# Altium PCB PCB1_DEC17.pcbdoc (part 2 of 2)
Units mil, origin at the board's own origin, x right, y up, seen from the top; angles counter-clockwise.
Board outline 2970 x 3145 mil, 2 copper layers (Top Layer, Bottom Layer); 82 components, 60 nets, 291 pads, 26 vias.
Unrouted connection lines stored in the file: 64.
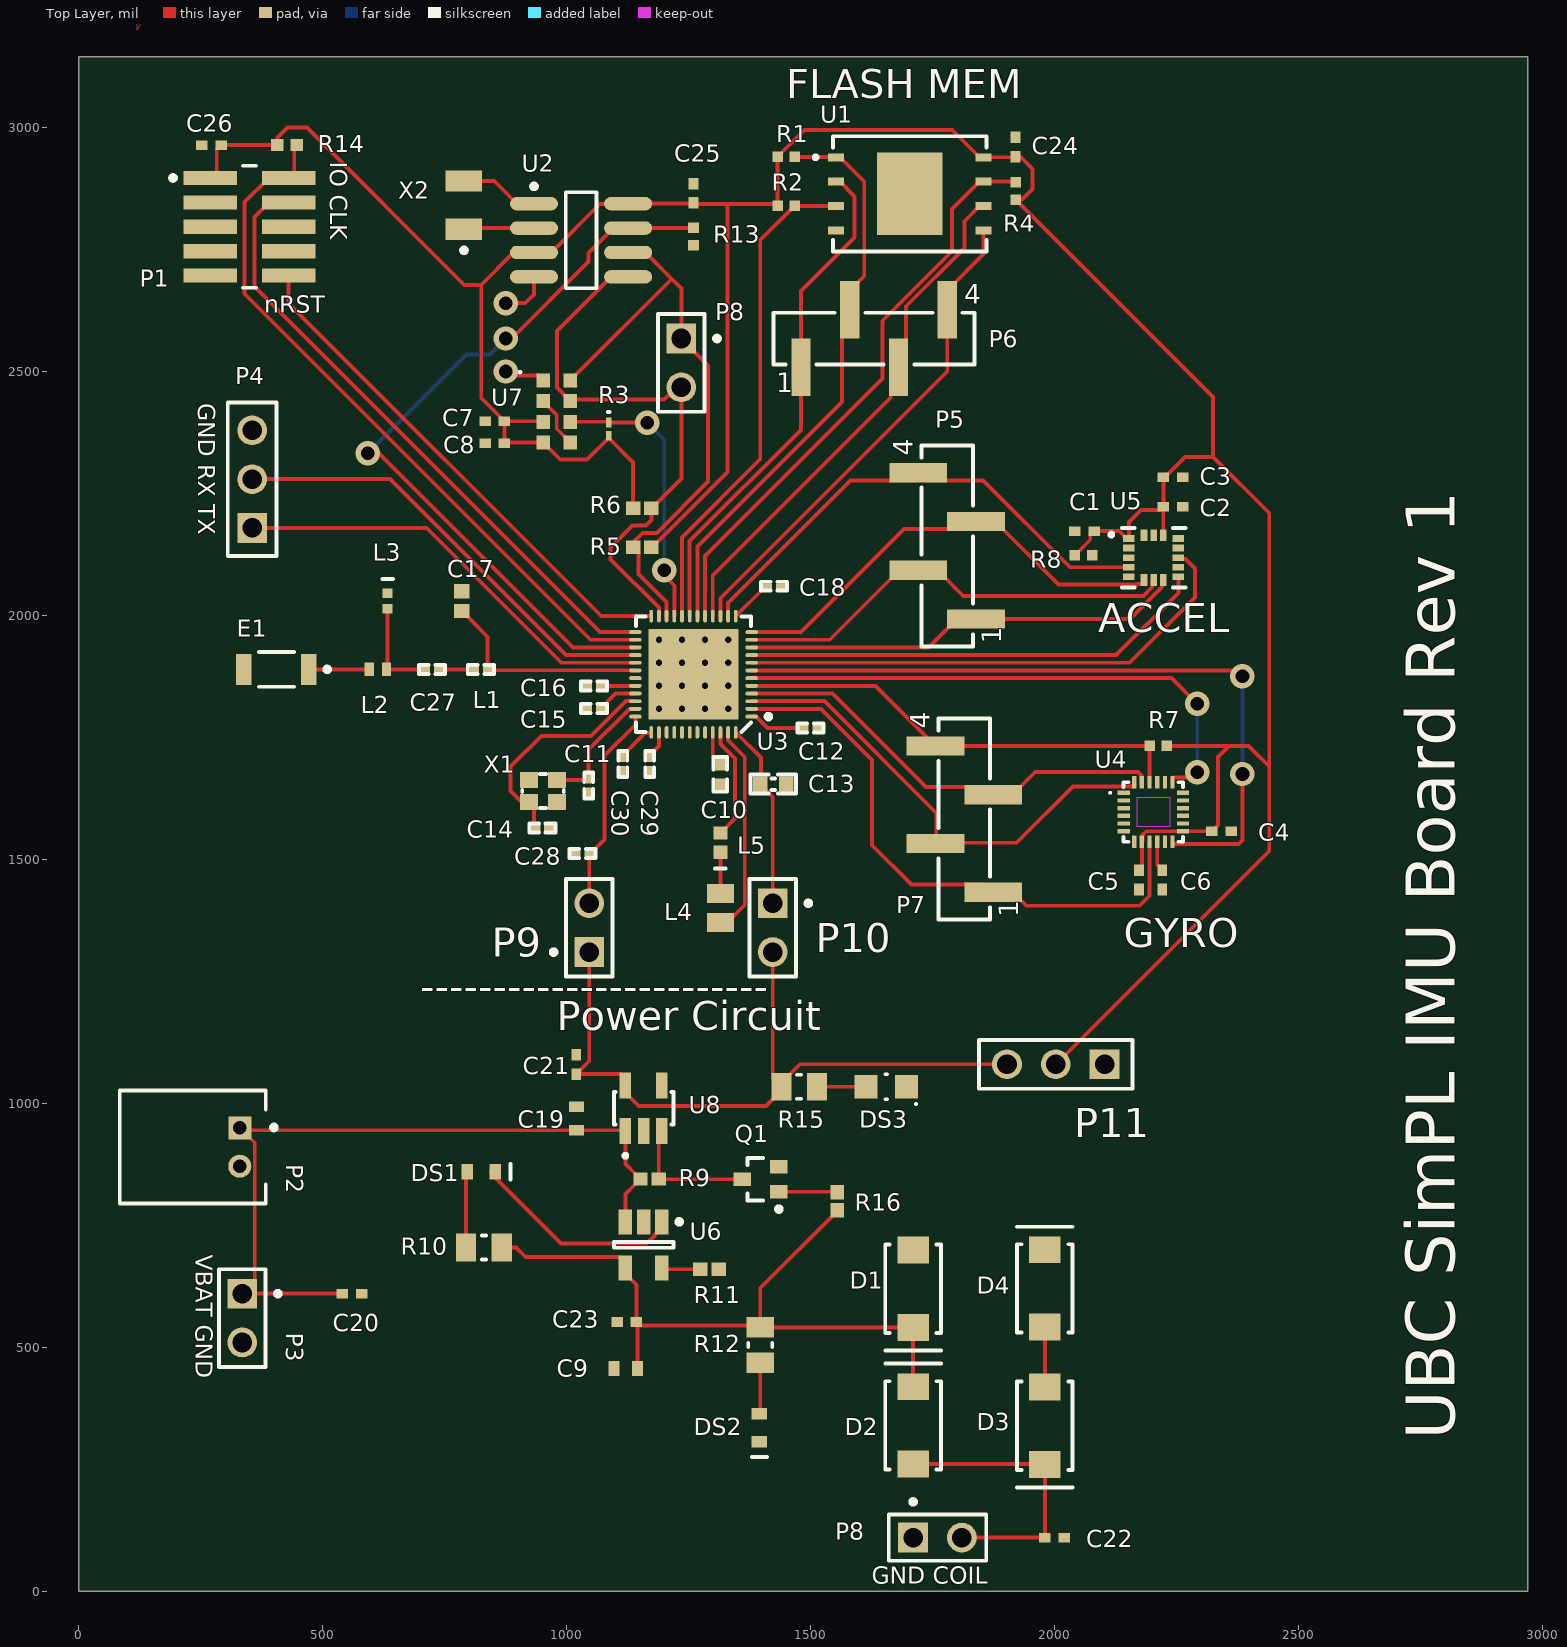
[diagram p0: Top Layer view]

## Via types
v1: diameter 25.98, hole 12.99, Top Layer to Bottom Layer, 16 vias
v2: diameter 50, hole 28, Top Layer to Bottom Layer, 10 vias

## Nets (pads, with @x,y where several pads share a name; then routed paths per layer and width w, separated by ;. In a path a pad name is that pad's centre, name@x,y a point inside that pad or via, vN(x,y) a via of type N, cw(c..) or ccw(c..) an arc to the next point about the centre after c; other vN are vias at no path point) (continued)
VBUS: C9.2 C23.1 D1.2 D2.2 R10.2 R12.2 R16.2 U6.4 | length 1489
  Top Layer w8: R10.2 896.47,704.84 916.12,685.19 1109.53,685.19 1120.31,674.41 U6.4 1120.31,650.79 1142.87,628.23 C23.1 C23.1@1145,549.68 ; C9.2 C23.1@1145,549.68 ; R16.2 1555,779.63 1396.8,621.43 R12.2 ; D2.2 D1.2 1397.47,540.51 R12.2 ; C23.1@1145,549.68 1149.72,544.97 1393.01,544.97 R12.2
XC1: C14.2 U3.34 X1.1 | length 467.4
  Top Layer w8: C14.2 933.31,1567.22 933.31,1607.02 X1.1 907.58,1617.42 885,1640 885,1690 948.08,1753.08 1050.08,1753.08 1121.19,1824.19 U3.34
XC2: C11.2 U3.35 X1.3 | length 256.3
  Top Layer w8: X1.3 1042.44,1662.7 C11.2 1045,1725.06 1128.38,1808.44 U3.35
pads on no net: E1.2 P1.6 P1.7 P1.8 P1.9 U3.41 U3.42 U3.43 U3.44 U4.1 U4.2 U4.3 U4.4 U4.5 U4.6 U4.7 U4.11 U4.14 U4.15 U4.16 U4.17 U4.21 U5.2 U5.3 U5.5 U5.10 U5.15 U8.4
copper on no net:
  other v1: 1189.13,1808.44 1236.38,1808.44 1283.62,1808.44 1330.87,1808.44 1189.13,1855.69 1236.38,1855.69 1283.62,1855.69 1330.87,1855.69 1189.13,1902.93 1236.38,1902.93 1283.62,1902.93 1330.87,1902.93 1189.13,1950.18 1236.38,1950.18 1283.62,1950.18 1330.87,1950.18

## Polygon pours and split planes (outlines as drawn)
no net on Top Layer (solid, pour order 6): 120,3200 120,3245 165,3290
no net on Top Layer (solid, pour order 8): 400,3310
+3V3 on Top Layer "Top Layer-+3V3" (solid, pour order 2): 1539.78,2727.5

## Silkscreen, mask and mechanical layers (free items; w line width, h text height)
Top Overlay:
  text "FLASH MEM" at 1450,3060 h60
  text "IO CLK" at 515,2930 h35 r270
  text "nRST" at 380,2620 h35
  text "GND RX TX" at 245,2435 h35 r270
  text "ACCEL" at 2090,1965.93 h60
  text "GYRO" at 2141.67,1320 h60
  text "------------------------" at 700,1210 h60
  text "Power Circuit" at 980,1150 h60
  text "VBAT GND" at 240,690 h35 r270
  text "UBC SimPL IMU Board Rev 1" at 2820,310 h100 r90
  text "GND COIL" at 1625,15 h35

## Text inside footprints (layer, text, board x,y; h text height)
P5: Top Overlay "4" at 1709.13,2327.54 h40 r90; Top Overlay "1" at 1890.24,1941.71 h40 r90
P6: Top Overlay "4" at 1815.04,2638.37 h40; Top Overlay "1" at 1429.21,2457.26 h40
P7: Top Overlay "1" at 1925.24,1381.71 h40 r90; Top Overlay "4" at 1744.13,1767.54 h40 r90